# Altium PCB Motor Driver (Single).PcbDoc
Units mm, origin at the board's own origin, x right, y up, seen from the top; angles counter-clockwise.
Board outline 46 x 36 mm, 2 copper layers (Top Layer, Bottom Layer); 10 components, 138 nets, 30 pads, 0 vias.
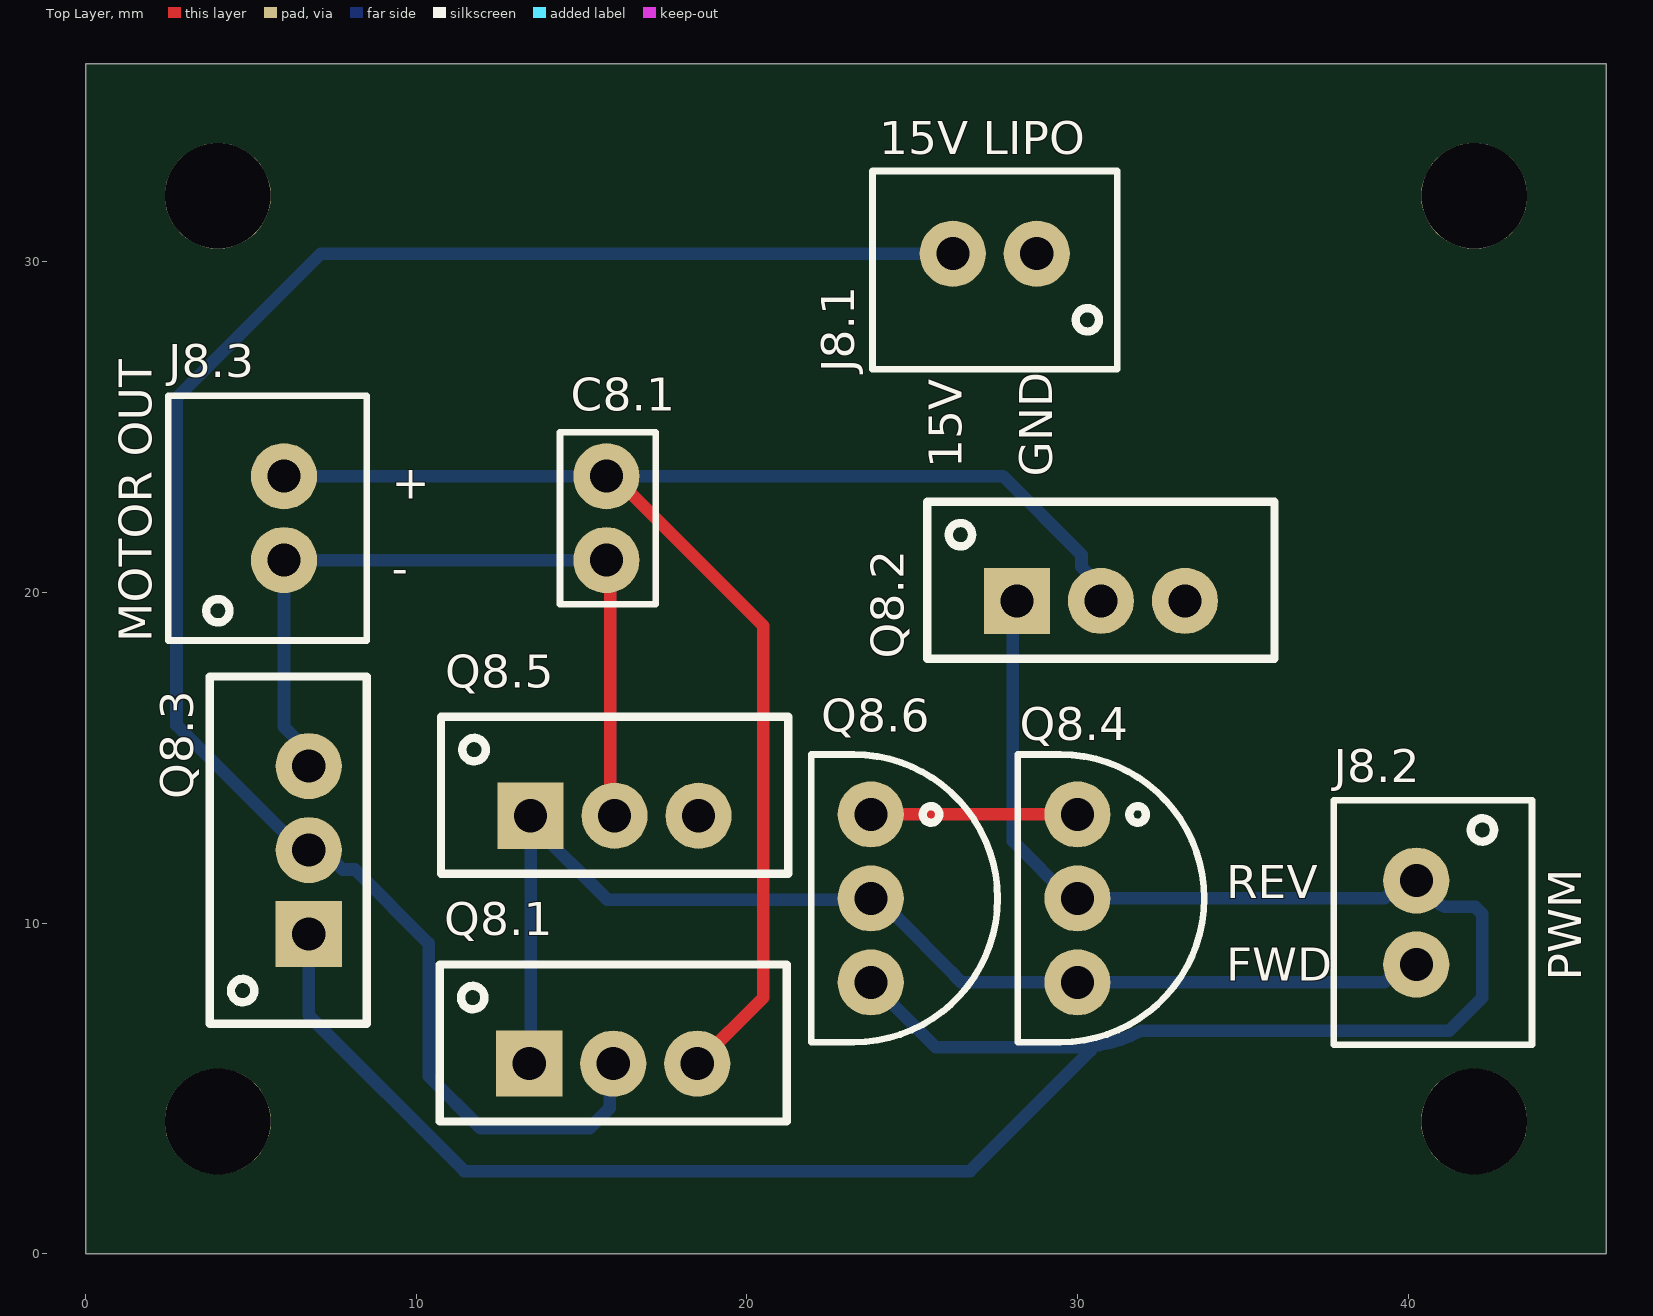
[diagram p0: Top Layer view]
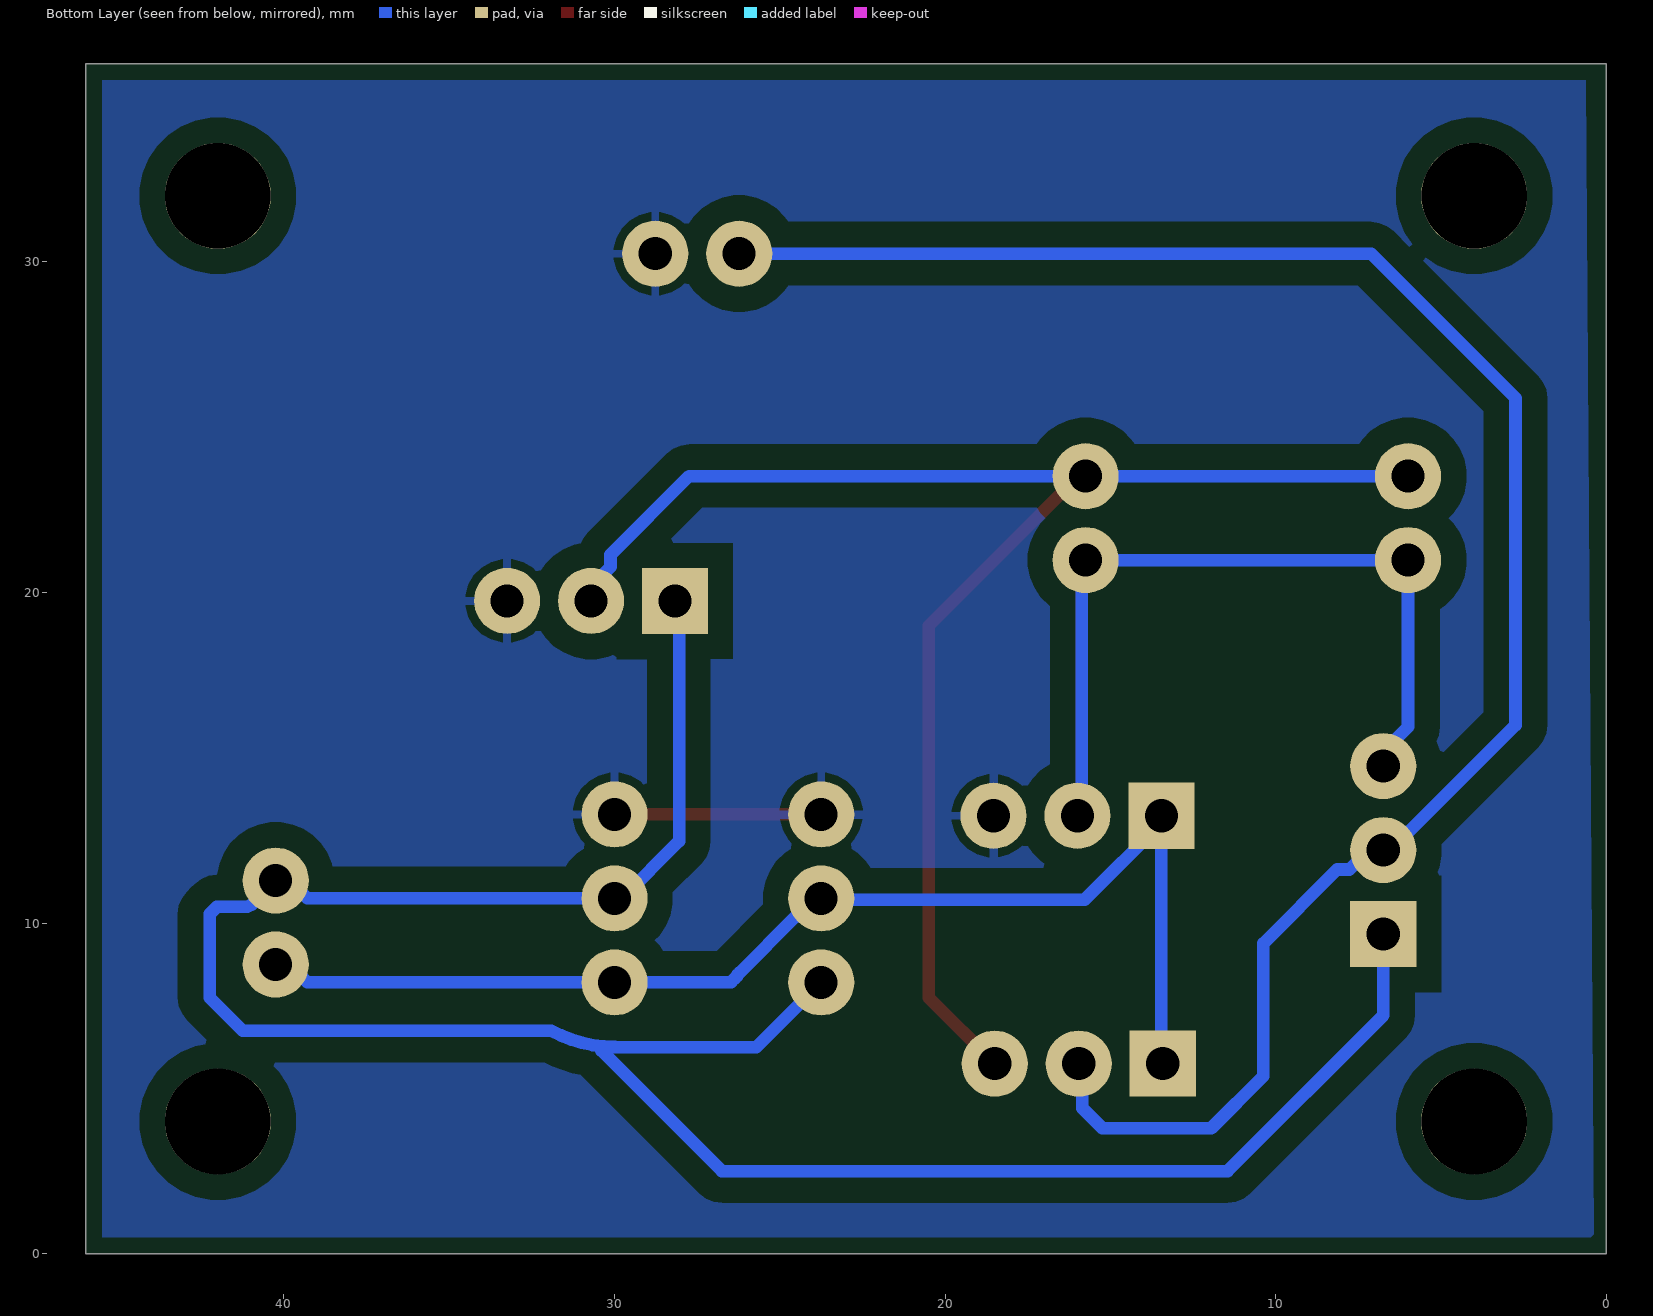
[diagram p1: Bottom Layer view, seen from below]
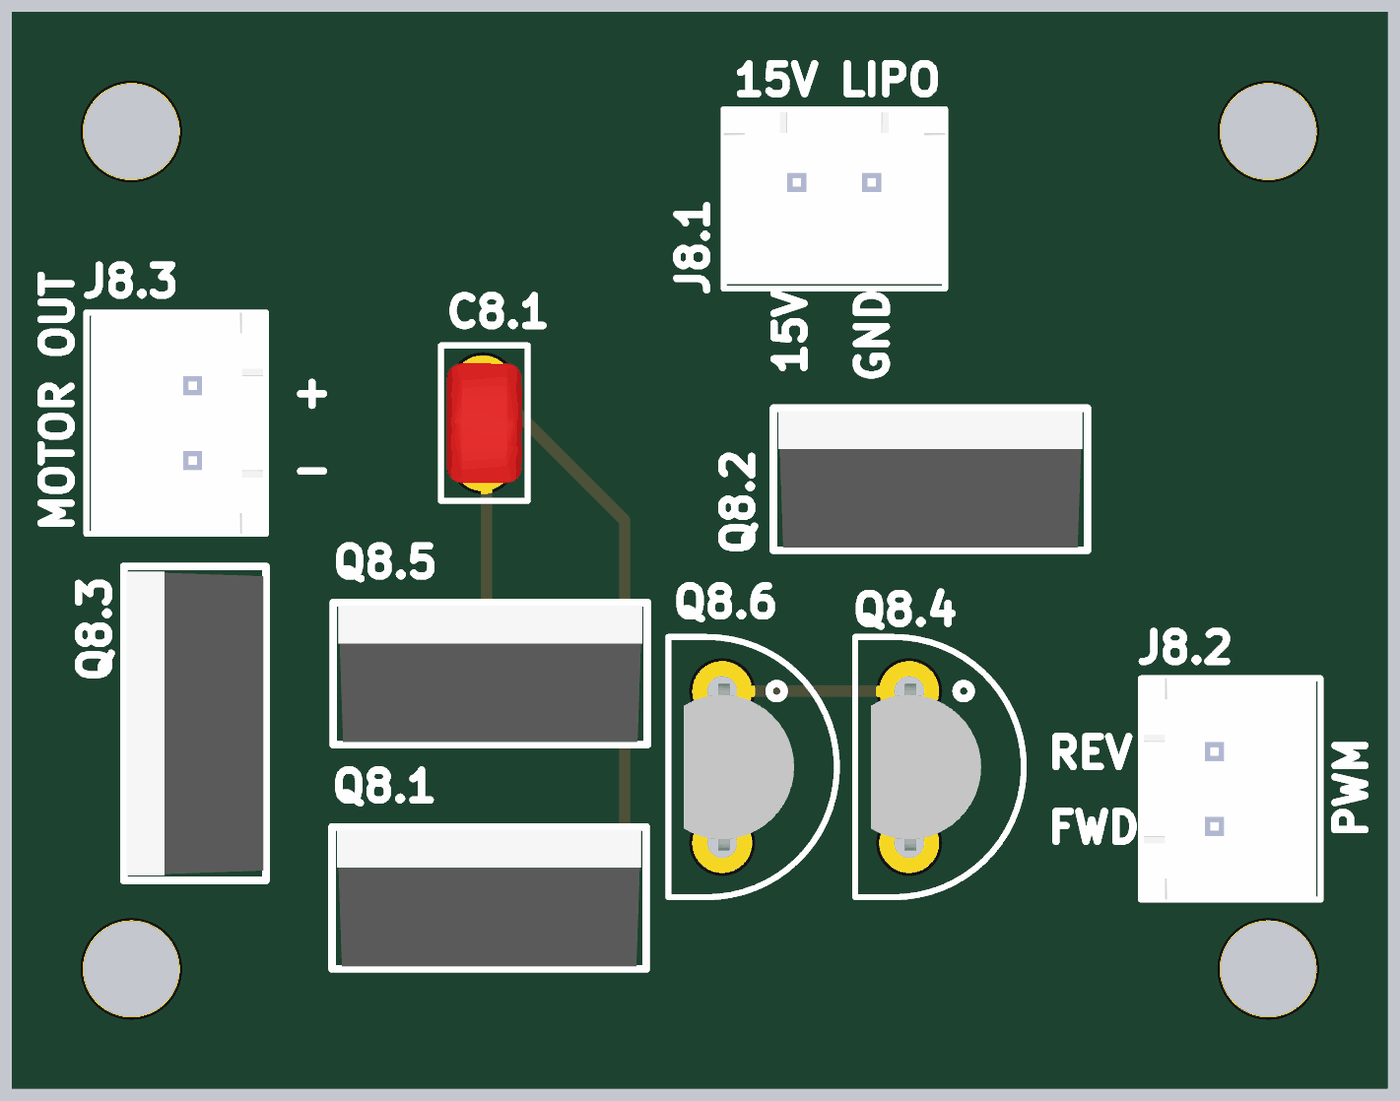
[diagram p2: 3D render of the assembled board from above, using the file's embedded part models]

## Layer stack, top to bottom
Top Solder: solder mask 0.0102, Solder Resist, Dk 3.5
Top Layer: signal copper 0.0356
Dielectric 1: dielectric 0.32, FR-4, Dk 4.8
Bottom Layer: signal copper 0.0356
Bottom Solder: solder mask 0.0102, Solder Resist, Dk 3.5

## Board outline
0,0 0,36 46,36 46,0

## Design rules (kind name [scope] priority, off if disabled: settings)
BoardOutlineClearance [All] p1: gap=0.3 ignorepadtopadclearanceinfootprint=FALSE
Clearance [All] p1: gap=0.762 ignorepadtopadclearanceinfootprint=FALSE
HoleSize [All] p1: absolutevalues=TRUE maxlimit=100 minlimit=0.4 maxpercent=80.000 minpercent=20.000
PolygonConnect [All] p1: connectstyle=Relief reliefconductorwidth=0.254 reliefentries=4 polygonreliefangle="90 Angle" airgapwidth=0.254
RoutingVias [All] p1: holewidth=0.711 width=1.27 viastyle="Through Hole" minholewidth=0.711 minwidth=1.27 maxholewidth=0.711 maxwidth=1.27
SolderMaskExpansion [All] p1: expansion=0.102 istentingtop=FALSE
UnRoutedNet [All] p1: checkbadconnections=TRUE
Width [All] p1: maxlimit=10 minlimit=0.381 preferedwidth=0.381
28 further rules are at their usual default settings.

## Components (designator, comment, footprint, x,y, rotation, side; value= is the part's Value field where it differs from the comment)
C8.1 "100n" "Non Polarized Cap" 15.75,22.25 r270 top
J8.1 "15V Lipo" "2pos JST" 27.5,30.25 r180 top
J8.2 "Output from Gatedriver" "2pos JST" 40.25,10.02 r270 top
J8.3 "Motor Pins" "2pos JST" 6,22.25 r90 top
Q8.1 "IRFZ44" TO220 15.96,5.75 r0 top
Q8.2 "IRFZ44" TO220 30.71,19.75 r0 top
Q8.3 "IRFZ44" TO220 6.75,12.21 r90 top
Q8.4 "VN2222LL" VN2222LL 30,10.75 r270 top
Q8.5 "IRFZ44" TO220 16,13.25 r0 top
Q8.6 "VN2222LL" VN2222LL 23.75,10.75 r270 top

## Footprints (in the part's own frame and the unit in brackets; to place one, negate y for a bottom-side part, rotate by r counter-clockwise, add the part's x,y. Pads: shape width x height; smd on the part's side, far side on the other; paste and mask are expansions set on the pad)
"2pos JST" [mm]
  round 2 hole 1: 1(-1.27,0) 2(1.27,0)
  silkscreen extent -3.7,-2.5 3.7,3.5, body extent -3.7,-2.4 3.7,3.35, height 7.01
"Non Polarized Cap" [mm] "Cap Generic THT"
  round 2 hole 1: 1(-1.27,0) 2(1.27,0)
  silkscreen extent -2.6,-1.4 2.6,1.5, body extent -2,-1.2 2,1.3, height 6
TO220 [mm]
  rect 2x2 hole 1: 1(-2.54,0)
  round 2 hole 1: 2(0,0) 3(2.54,0)
  silkscreen extent -5.25,-1.75 5.25,3, body extent -5.08,-1.66 5.08,2.91, height 19.6
VN2222LL [mm]
  round 2 hole 1: 1(-2.54,0) 2(0,0) 3(2.54,0)
  silkscreen extent -4.35,-1.8 4.35,3.83, body extent -2.78,-1.28 2.78,2.4, height 7.82

## Part data
C8.1: library part Cap_Generic
J8.1: library part "2pos Conn", "2pos Conn JST"
J8.2 J8.3: library part "2pos Conn"
Q8.1 Q8.2 Q8.3 Q8.5: library part "IRFZ44 NMOS", "IRFZ44EPBF N-Channel 60 V 48A 110W Through Hole TO-220AB", Supplier Part Number 1=IRFZ44ZLPBF-ND, Supplier 1=Digi-Key
Q8.4 Q8.6: library part "VN2222LL NMOS", "VN2222LL N-Channel 60 V 150mA 400mW Through Hole TO-92 (TO-226)", Supplier Part Number 1=689-VN2222LL-G, Supplier 1=Mouser

## Free pads (board coordinates)
  round 3.2 hole 3.2: ""(4,4) ""(4,32) ""(42,4) ""(42,32)

## Nets (pads, with @x,y where several pads share a name; then routed paths per layer and width w, separated by ;. In a path a pad name is that pad's centre, name@x,y a point inside that pad or via, vN(x,y) a via of type N, cw(c..) or ccw(c..) an arc to the next point about the centre after c; other vN are vias at no path point)
2.5V_GND: 
3.3V_P: 
5V_ARM: 
5V_P: 
5V_SERVO: 
8V: 
15V: J8.1.2 Q8.1.2 Q8.3.2 | length 57.3
  Bottom Layer w0.381: Q8.1.2 15.85,5.64 15.85,4.402 15.246,3.797 11.953,3.797 10.375,5.375 10.375,9.392 8.145,11.623 7.776,11.623 7.188,12.21 Q8.3.2 6.529,12.21 2.75,15.989 2.75,25.884 7.117,30.25 J8.1.2
ARM_SERV_BP_OUT: 
ARM_SERV_PWM: 
BOX_SERV_BP_OUT: 
BOX_SERV_PWM: 
BRIDGE_SERV_BP_OUT: 
BRIDGE_SERV_PWM: 
CLAW_SERV_BP_OUT: 
CLAW_SERV_PWM: 
DCLK: 
DIO: 
ECHO_F_M: 
ECHO_S_L: 
ECHO_S_R: 
ECHO_SPARE: 
ENCODER_L_I: 
ENCODER_L_Q: 
ENCODER_R_I: 
ENCODER_R_Q: 
FWD: J8.2.2 Q8.1.1 Q8.4.3 Q8.5.1 Q8.6.2 | length 36.7
  Bottom Layer w0.381: Q8.1.1 13.46,5.79 Q8.5.1@13.46,13.029 ; Q8.5.1 Q8.5.1@13.46,13.029 ; Q8.6.2@23.75,10.71 15.779,10.71 Q8.5.1@13.46,13.029 ; Q8.6.2@23.861,10.639 Q8.6.2 23.971,10.75 24.537,10.185 26.208,8.513 26.29,8.431 ccw(c26.511,8.431) 26.293,8.395 26.366,8.322 26.475,8.213 ccw(c26.511,8.431) 26.511,8.21 39.292,8.21 39.832,8.75 J8.2.2
FWD_BP_OUT: 
IR_LEFT_TRANS: 
IR_RIGHT_TRANS: 
IR_SNS_LEFT: 
IR_SNS_RIGHT: 
LEFT+: 
LEFT-: 
LEFT_FWD: 
LEFT_FWD_BP_OUT: 
LEFT_REV: 
LEFT_REV_BP_OUT: 
M_GND: J8.1.1 Q8.2.3 Q8.4.1 Q8.5.3 Q8.6.1 | length 6.2
  Top Layer w0.381: Q8.6.1 Q8.4.1
MAGNET_SNS: 
MOTOR+: C8.1.1 J8.3.2 Q8.1.3 Q8.2.2 | length 47.7
  Top Layer w0.381: C8.1.1 15.971,23.52 20.492,18.999 20.492,7.742 Q8.1.3
  Bottom Layer w0.381: J8.3.2 C8.1.1 27.747,23.52 30.123,21.145 30.123,20.776 30.71,20.188 Q8.2.2 ; Q8.1.3@18.5,5.529 Q8.1.3
MOTOR-: C8.1.2 J8.3.1 Q8.3.3 Q8.5.2 | length 32
  Top Layer w0.381: C8.1.2 15.875,20.855 15.875,13.375 Q8.5.2
  Bottom Layer w0.381: Q8.3.3 6.75,15.188 6,15.938 J8.3.1 C8.1.2 15.875,20.855 15.875,13.375 Q8.5.2
NetC1.8_2: 
NetC5.1_1: 
NetC5.1_2: 
NetC5.2_1: 
NetC5.2_2: 
NetC5.3_1: 
NetC5.4_1: 
NetQ2.1_2: 
NetQ2.1_3: 
NetQ2.2_2: 
NetQ2.2_3: 
NetQ2.3_2: 
NetQ2.3_3: 
NetQ2.4_2: 
NetQ2.4_3: 
NetQ3.1_2: 
NetQ3.1_3: 
NetQ3.2_2: 
NetQ3.2_3: 
NetQ3.3_2: 
NetQ3.3_3: 
NetQ3.4_2: 
NetQ3.4_3: 
NetQ3.5_1: 
NetQ3.6_1: 
NetQ3.7_1: 
NetQ3.8_1: 
NetQ7.1_2: 
NetQ7.1_3: 
NetQ7.2_2: 
NetQ7.2_3: 
NetR2.3_2: 
NetR2.6_2: 
NetR2.7_1: 
NetR2.8_1: 
NetR2.13_2: 
NetR2.14_2: 
NetR2.15_2: 
NetR2.16_2: 
NetR3.3_2: 
NetR3.4_1: 
NetR3.5_1: 
NetR3.6_2: 
NetR3.11_2: 
NetR3.12_2: 
NetR3.13_1: 
NetR3.14_2: 
NetR4.11_2: 
NetR4.13_2: 
NetR4.15_2: 
NetR4.17_2: 
NetR4.19_2: 
NetR5.2_1: 
NetR5.4_2: 
NetR5.7_1: 
NetR5.9_2: 
NetR5.15_1: 
NetR6.3_2: 
NetR7.5_2: 
NetR7.6_2: 
NetR7.7_1: 
NetR7.8_1: 
P_GND: 
REF_F_L_COL: 
REF_F_L_LED: 
REF_F_L_SNS: 
REF_F_M_COL: 
REF_F_M_LED: 
REF_F_M_SNS: 
REF_F_R_COL: 
REF_F_R_LED: 
REF_F_R_SNS: 
REF_R_COL: 
REF_R_LED: 
REF_R_SNS: 
REF_S_L_COL: 
REF_S_L_LED: 
REF_S_L_SNS: 
REF_S_R_COL: 
REF_S_R_LED: 
REF_S_R_SNS: 
REV: J8.2.1 Q8.2.1 Q8.3.1 Q8.4.2 Q8.6.3 | length 77
  Bottom Layer w0.381: Q8.3.1 6.75,7.21 11.46,2.5 26.75,2.5 30.4,6.15 30.4,6.25 30,6.25 25.71,6.25 Q8.6.3 ; Q8.2.1 28.047,19.627 28.047,12.627 28.047,12.481 29.779,10.75 Q8.4.2 39.292,10.75 39.916,11.374 40.062,11.52 40.5,11.52 40.71,11.31 40.25,11.31 J8.2.1@39.98,11.31 ; 30,6.257 ccw(c30,10.223) 31.914,6.75 41.25,6.75 42.25,7.75 42.25,10.277 42.138,10.388 42.027,10.5 41.116,10.5 ccw(c40.25,8.75) 40.978,10.562 40.926,10.614 J8.2.1 ; J8.2.1@40,10.792 40,10.75 40.048,10.703 J8.2.1@40.25,10.702
REV_BP_OUT: 
RIGHT+: 
RIGHT-: 
RIGHT_FWD: 
RIGHT_FWD_BP_OUT: 
RIGHT_REV: 
RIGHT_REV_BP_OUT: 
SPARE_1: 
SW_CLAW+: 
SW_CLAW_SNS: 
SW_FRONT+: 
SW_FRONT_SNS: 
SW_REAR+: 
SW_REAR_SNS: 
TRIG_COM: 

## Polygon pours and split planes (outlines as drawn)
M_GND on Bottom Layer "GND " (solid, remove dead copper, pour order 0): 0.617,35.5 45.5,35.5 45.5,0.5 0.383,0.5

## Silkscreen, mask and mechanical layers (free items; w line width, h text height)
Top Overlay:
  text "15V LIPO" at 24.004,33.254 h1
  text "15V" at 26.496,23.754 h1 r90
  text "GND" at 29.246,23.504 h1 r90
  text "+" at 9.254,22.837 h1
  text "-" at 9.254,20.254 h1
  text "MOTOR OUT" at 1.996,18.504 h1 r90
  text "REV" at 34.504,10.754 h1
  text "FWD" at 34.504,8.254 h1
  text "PWM" at 45.246,8.254 h1 r90
Mechanical 1:
  the board outline again, w0.2